# Altium PCB 底板20160428.PcbDoc (part 2 of 5)
Units mm, origin at the board's own origin, x right, y up, seen from the top; angles counter-clockwise.
Board outline 123.72 x 102.71 mm, 2 copper layers (Top Layer, Bottom Layer); 224 components, 227 nets, 768 pads, 282 vias.
Unrouted connection lines stored in the file: 2.
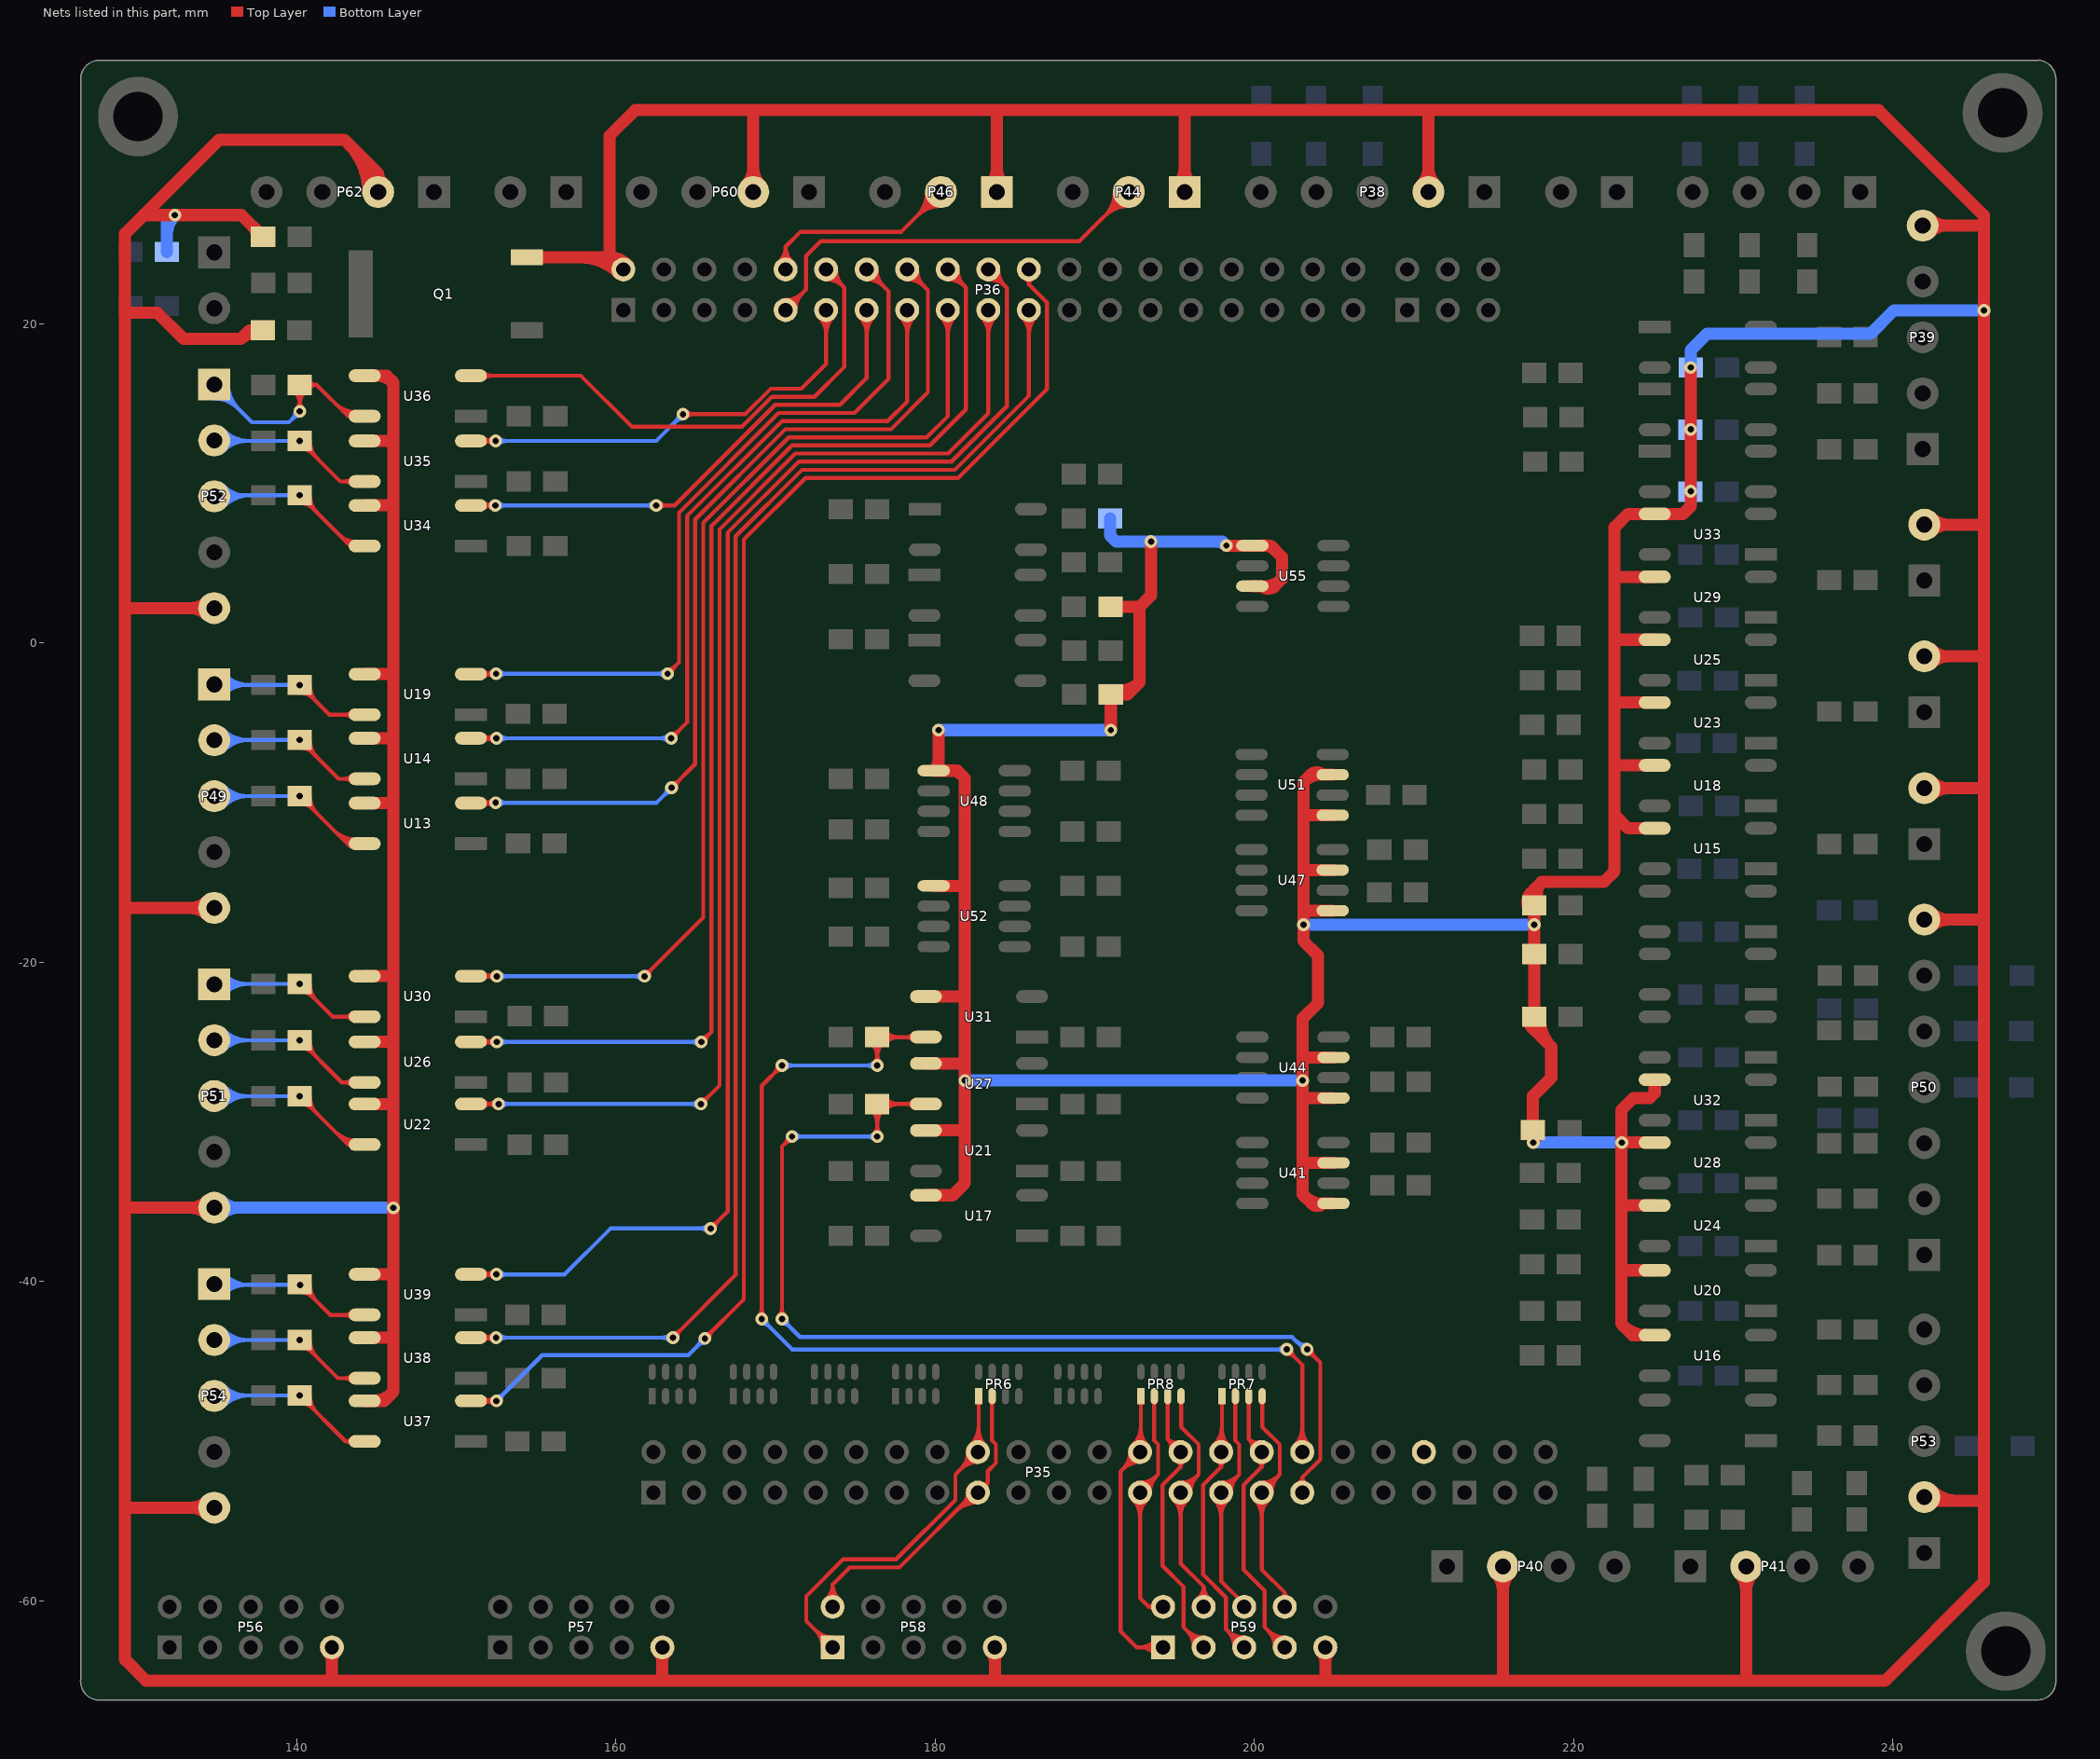
[diagram p2: the nets of this part, all layers, seen from the top]

## Via types
v1: diameter 0.8, hole 0.4, Top Layer to Bottom Layer, 282 vias

## Nets (pads, with @x,y where several pads share a name; then routed paths per layer and width w, separated by ;. In a path a pad name is that pad's centre, name@x,y a point inside that pad or via, vN(x,y) a via of type N, cw(c..) or ccw(c..) an arc to the next point about the centre after c; other vN are vias at no path point) (continued)
CDH3_KR7: P35.17 P58.2 PR6.2 | length 27.4
  Top Layer w0.254: P58.2@173.17,-59.9 ccw(c172.351,-58.979) 173.584,-58.979 ; P58.2@173.339,-60.09 ccw(c172.854,-59.544) 173.584,-59.544 ccw(c174.313,-59.544) P58.2@173.829,-60.09 ; P58.2@173.584,-60.366 173.584,-58.979 ; P58.2@173.997,-59.9 cw(c174.816,-58.979) 173.584,-58.979 ; 181.234,-54.434 cw(c182.677,-55.876) P35.17@182.677,-53.836 ; 181.668,-54 cw(c182.677,-55.009) P35.17@182.677,-53.582 ; 181.77,-53.897 ccw(c181.086,-53.213) P35.17@182.054,-53.213 ; P35.17@182.945,-52.651 ccw(c183.08,-52.37) 183.3,-52.59 ; P35.17@183.239,-52.944 cw(c183.52,-52.81) 183.3,-52.59 ; PR6.2@183.498,-47.528 cw(c183.325,-47.701) 183.57,-47.701 cw(c183.816,-47.701) PR6.2@183.642,-47.528 ; PR6.2@183.57,-47.177 183.57,-49.967 183.808,-50.205 183.808,-51.364 183.3,-51.872 183.3,-52.59 ; 173.584,-58.979 174.656,-57.906 177.762,-57.906 182.455,-53.213 P35.17@182.677,-53.213 183.3,-52.59
CDH3_KR8: P35.18 P58.1 PR6.1 | length 34.5
  Top Layer w0.254: P58.1@172.961,-62.906 ccw(c171.457,-62.906) 172.52,-61.842 ccw(c173.584,-60.779) P58.1@173.584,-62.283 ; P58.1@173.215,-62.906 ccw(c172.324,-62.906) 172.954,-62.276 ccw(c173.584,-61.646) P58.1@173.584,-62.537 ; P58.1@173.584,-62.906 171.933,-61.255 171.933,-59.707 174.242,-57.398 177.551,-57.398 181.268,-53.681 181.268,-52.082 P35.18@182.677,-50.673 182.732,-50.618 PR6.1@182.732,-47.177 ; P35.18@182.054,-50.673 cw(c180.55,-50.673) 181.613,-51.737 cw(c182.677,-52.8) P35.18@182.677,-51.296 ; P35.18@182.236,-50.232 ccw(c181.039,-49.036) 182.732,-49.036 ; P35.18@182.308,-50.673 cw(c181.417,-50.673) 182.047,-51.303 cw(c182.677,-51.933) P35.18@182.677,-51.042 ; P35.18@182.416,-50.412 ccw(c181.653,-49.649) 182.732,-49.649 ; PR6.1@182.66,-47.528 cw(c182.487,-47.701) 182.732,-47.701 cw(c182.977,-47.701) PR6.1@182.804,-47.528 ; 182.732,-49.916 ccw(c183.434,-49.916) P35.18@182.938,-50.412 ; 182.732,-49.302 ccw(c184.047,-49.302) P35.18@183.117,-50.232
CDH4_KR1: P35.31 P59.8 PR7.4 | length 23.4
  Top Layer w0.254: P35.31@200.016,-53.654 cw(c198.953,-54.717) 200.457,-54.717 cw(c201.961,-54.717) P35.31@200.897,-53.654 ; P35.31@200.196,-53.474 cw(c199.566,-54.104) 200.457,-54.104 cw(c201.348,-54.104) P35.31@200.718,-53.474 ; PR7.4@200.415,-47.528 cw(c200.241,-47.701) 200.487,-47.701 cw(c200.732,-47.701) PR7.4@200.559,-47.528 ; P35.31@200.457,-52.844 ccw(c200.457,-51.953) 201.087,-52.583 ccw(c201.717,-53.213) P35.31@200.826,-53.213 ; P35.31@200.457,-52.59 ccw(c200.457,-51.086) 201.52,-52.149 ccw(c202.584,-53.213) P35.31@201.08,-53.213 ; PR7.4@200.487,-47.177 200.487,-49.103 201.588,-50.205 201.588,-52.082 P35.31@200.457,-53.213 200.457,-58.039 201.905,-59.487 ; P59.8@201.698,-59.778 ccw(c201.596,-59.487) 201.905,-59.487 ; P59.8@201.905,-60.366 201.905,-59.487 ; P59.8@202.111,-59.778 cw(c202.213,-59.487) 201.905,-59.487
CDH4_KR2: P35.32 P59.7 PR7.3 | length 24.2
  Top Layer w0.254: PR7.3@199.577,-47.528 cw(c199.403,-47.701) 199.648,-47.701 cw(c199.894,-47.701) PR7.3@199.72,-47.528 ; PR7.3@199.648,-47.177 199.648,-49.865 ; P35.32@199.848,-50.542 ccw(c199.127,-50.386) 199.648,-49.865 ; P35.32@200.214,-51.247 cw(c200.058,-51.613) 200.457,-51.613 ; P35.32@200.325,-50.064 cw(c200.17,-49.343) 199.648,-49.865 ; P35.32@200.7,-51.247 ccw(c200.855,-51.613) 200.457,-51.613 ; P59.7@201.282,-62.906 ccw(c199.778,-62.906) 200.841,-61.842 ccw(c201.905,-60.779) P59.7@201.905,-62.283 ; P59.7@201.536,-62.906 ccw(c200.645,-62.906) 201.275,-62.276 ccw(c201.905,-61.646) P59.7@201.905,-62.537 ; P59.7@201.905,-62.906 200.635,-61.636 200.635,-59.36 199.326,-58.051 199.326,-52.745 200.457,-51.614 ; 199.648,-49.865 P35.32@200.457,-50.673 200.457,-51.614
CDH4_KR3: P35.29 P59.6 PR7.2 | length 22.3
  Top Layer w0.254: P35.29@197.476,-53.654 cw(c196.413,-54.717) 197.917,-54.717 cw(c199.421,-54.717) P35.29@198.357,-53.654 ; P35.29@197.656,-53.474 cw(c197.026,-54.104) 197.917,-54.104 cw(c198.808,-54.104) P35.29@198.178,-53.474 ; P35.29@197.917,-52.844 ccw(c197.917,-51.953) 198.547,-52.583 ccw(c199.177,-53.213) P35.29@198.286,-53.213 ; P35.29@197.917,-52.59 ccw(c197.917,-51.086) 198.98,-52.149 ccw(c200.044,-53.213) P35.29@198.54,-53.213 ; PR7.2@198.738,-47.528 cw(c198.565,-47.701) 198.81,-47.701 cw(c199.056,-47.701) PR7.2@198.882,-47.528 ; PR7.2@198.81,-47.177 198.81,-49.967 199.048,-50.205 199.048,-52.082 P35.29@197.917,-53.213 197.917,-58.761 199.365,-60.209 P59.6@199.365,-60.366
CDH4_KR4: P35.30 P59.5 PR7.1 | length 26.1
  Top Layer w0.254: P35.30@197.476,-50.232 ccw(c196.279,-49.036) 197.972,-49.036 ; P35.30@197.656,-50.412 ccw(c196.893,-49.649) 197.972,-49.649 ; P35.30@197.674,-51.247 cw(c197.518,-51.613) 197.917,-51.613 ; PR7.1@197.9,-47.528 cw(c197.727,-47.701) 197.972,-47.701 cw(c198.217,-47.701) PR7.1@198.044,-47.528 ; 197.972,-49.916 ccw(c198.674,-49.916) P35.30@198.178,-50.412 ; 197.972,-49.302 ccw(c199.287,-49.302) P35.30@198.357,-50.232 ; PR7.1@197.972,-47.177 197.972,-50.618 P35.30@197.917,-50.673 197.917,-51.614 ; P35.30@198.16,-51.247 ccw(c198.315,-51.613) 197.917,-51.613 ; P59.5@198.742,-62.906 ccw(c197.238,-62.906) 198.301,-61.842 ccw(c199.365,-60.779) P59.5@199.365,-62.283 ; P59.5@198.996,-62.906 ccw(c198.105,-62.906) 198.735,-62.276 ccw(c199.365,-61.646) P59.5@199.365,-62.537 ; P59.5@199.365,-62.906 198.222,-61.763 198.222,-59.784 196.786,-58.349 196.786,-52.745 197.917,-51.614
CDH4_KR5: P35.27 P59.4 PR8.4 | length 24.4
  Top Layer w0.254: P35.27@194.936,-53.654 cw(c193.873,-54.717) 195.377,-54.717 cw(c196.881,-54.717) P35.27@195.817,-53.654 ; P35.27@195.116,-53.474 cw(c194.486,-54.104) 195.377,-54.104 cw(c196.268,-54.104) P35.27@195.638,-53.474 ; PR8.4@195.335,-47.528 cw(c195.161,-47.701) 195.407,-47.701 cw(c195.652,-47.701) PR8.4@195.479,-47.528 ; P35.27@195.377,-52.844 ccw(c195.377,-51.953) 196.007,-52.583 ccw(c196.637,-53.213) P35.27@195.746,-53.213 ; P35.27@195.377,-52.59 ccw(c195.377,-51.086) 196.44,-52.149 ccw(c197.504,-53.213) P35.27@196,-53.213 ; PR8.4@195.407,-47.177 195.407,-49.103 196.508,-50.205 196.508,-52.082 P35.27@195.377,-53.213 195.377,-57.658 196.825,-59.106 ; P59.4@196.446,-59.871 ccw(c195.862,-59.106) 196.825,-59.106 ; P59.4@196.825,-60.366 196.825,-59.106 ; P59.4@197.203,-59.871 cw(c197.787,-59.106) 196.825,-59.106
CDH4_KR6: P35.28 P59.3 PR8.3 | length 24.2
  Top Layer w0.254: PR8.3@194.497,-47.528 cw(c194.323,-47.701) 194.568,-47.701 cw(c194.814,-47.701) PR8.3@194.64,-47.528 ; PR8.3@194.568,-47.177 194.568,-49.865 ; P35.28@194.768,-50.542 ccw(c194.047,-50.386) 194.568,-49.865 ; P35.28@195.134,-51.247 cw(c194.978,-51.613) 195.377,-51.613 ; P35.28@195.245,-50.064 cw(c195.09,-49.343) 194.568,-49.865 ; P35.28@195.62,-51.247 ccw(c195.775,-51.613) 195.377,-51.613 ; P59.3@196.202,-62.906 ccw(c194.698,-62.906) 195.761,-61.842 ccw(c196.825,-60.779) P59.3@196.825,-62.283 ; P59.3@196.456,-62.906 ccw(c195.565,-62.906) 196.195,-62.276 ccw(c196.825,-61.646) P59.3@196.825,-62.537 ; P59.3@196.825,-62.906 195.555,-61.636 195.555,-59.106 194.246,-57.797 194.246,-52.745 195.377,-51.614 ; 194.568,-49.865 P35.28@195.377,-50.673 195.377,-51.614
CDH4_KR7: P35.25 P59.2 PR8.2 | length 23.6
  Top Layer w0.254: P35.25@192.396,-53.654 cw(c191.333,-54.717) 192.837,-54.717 cw(c194.341,-54.717) P35.25@193.277,-53.654 ; P35.25@192.576,-53.474 cw(c191.946,-54.104) 192.837,-54.104 cw(c193.728,-54.104) P35.25@193.098,-53.474 ; P35.25@192.837,-52.844 ccw(c192.837,-51.953) 193.467,-52.583 ccw(c194.097,-53.213) P35.25@193.206,-53.213 ; P35.25@192.837,-52.59 ccw(c192.837,-51.086) 193.9,-52.149 ccw(c194.964,-53.213) P35.25@193.46,-53.213 ; PR8.2@193.658,-47.528 cw(c193.485,-47.701) 193.73,-47.701 cw(c193.976,-47.701) PR8.2@193.802,-47.528 ; P59.2@193.701,-60.585 ccw(c193.386,-60.703) 193.386,-60.366 ; P59.2@193.701,-60.147 cw(c193.386,-60.029) 193.386,-60.366 ; PR8.2@193.73,-47.177 193.73,-49.967 193.968,-50.205 193.968,-52.082 P35.25@192.837,-53.213 192.837,-59.817 193.386,-60.366 ; P59.2@194.285,-60.366 193.386,-60.366
CDH4_KR8: P35.26 P59.1 PR8.1 | length 30
  Top Layer w0.254: P35.26@192.214,-50.673 cw(c190.71,-50.673) 191.773,-51.737 cw(c192.837,-52.8) P35.26@192.837,-51.296 ; P35.26@192.396,-50.232 ccw(c191.199,-49.036) 192.892,-49.036 ; P35.26@192.468,-50.673 cw(c191.577,-50.673) 192.207,-51.303 cw(c192.837,-51.933) P35.26@192.837,-51.042 ; P35.26@192.576,-50.412 ccw(c191.813,-49.649) 192.892,-49.649 ; PR8.1@192.82,-47.528 cw(c192.647,-47.701) 192.892,-47.701 cw(c193.137,-47.701) PR8.1@192.964,-47.528 ; 192.892,-49.916 ccw(c193.594,-49.916) P35.26@193.098,-50.412 ; 192.892,-49.302 ccw(c194.207,-49.302) P35.26@193.277,-50.232 ; PR8.1@192.892,-47.177 192.892,-50.618 P35.26@192.837,-50.673 191.618,-51.892 191.618,-61.9 192.624,-62.906 P59.1@194.285,-62.906 ; P59.1@193.844,-63.346 ccw(c192.781,-64.41) 192.781,-62.906 ccw(c192.781,-61.402) P59.1@193.844,-62.465 ; P59.1@194.024,-63.167 ccw(c193.394,-63.797) 193.394,-62.906 ccw(c193.394,-62.015) P59.1@194.024,-62.645
DJ1_KC1: P36.16 U13.3 | length 66.7
  Top Layer w0.254: U13.3@150.927,-10.008 v1(152.476,-10.008) v1@152.48,-10.008 ; U13.3@151.715,-10.225 cw(c152.24,-10.75) v1@152.24,-10.008 ; U13.3@151.715,-9.839 ccw(c152.122,-9.432) v1@152.122,-10.008 ; 151.988,-9.972 ccw(c152.046,-9.752) v1@152.241,-9.868 ; 152.03,-9.983 cw(c151.94,-10.317) v1@152.24,-10.144 ; v1@152.239,-9.873 cw(c151.858,-9.656) 151.971,-10.08 cw(c152.043,-10.348) v1@152.262,-10.176 ; v1@152.283,-10.201 ccw(c151.817,-10.667) 151.817,-10.008 ccw(c151.817,-9.349) v1@152.283,-9.815 ; v1(163.5,-9.068) 164.973,-7.595 164.973,7.74 170.619,13.386 177.241,13.386 179.553,15.697 179.553,22.098 P36.16@178.257,23.393 ; v1@163.5,-8.795 ccw(c163.5,-8.136) 163.966,-8.602 ccw(c164.432,-9.068) v1@163.773,-9.068 ; P36.16@178.257,22.77 cw(c178.257,21.266) 179.321,22.33 cw(c180.384,23.393) P36.16@178.88,23.393 ; P36.16@178.257,23.024 cw(c178.257,22.134) 178.887,22.763 cw(c179.517,23.393) P36.16@178.626,23.393
  Bottom Layer w0.254: v1(152.476,-10.008) 162.56,-10.008 v1(163.5,-9.068) ; v1@152.669,-10.201 cw(c153.135,-10.667) 153.135,-10.008 cw(c153.135,-9.349) v1@152.669,-9.815 ; v1@163.227,-9.068 cw(c162.568,-9.068) 163.034,-9.534 cw(c163.5,-10) v1@163.5,-9.341
DJ1_KC2: P36.15 U14.3 | length 59.5
  Top Layer w0.254: U14.3@150.927,-5.969 v1@152.48,-5.969 ; U14.3@151.715,-6.161 cw(c152.179,-6.625) v1@152.179,-5.969 ; U14.3@151.715,-5.775 ccw(c152.184,-5.306) v1@152.184,-5.969 ; 152.002,-6.016 cw(c152.074,-6.287) v1@152.304,-6.126 ; 152.001,-5.92 ccw(c152.074,-5.647) v1@152.304,-5.811 ; 152.075,-5.94 cw(c151.983,-6.283) v1@152.291,-6.105 ; 152.077,-5.996 ccw(c151.986,-5.657) v1@152.291,-5.833 ; v1@152.334,-6.162 ccw(c151.868,-6.628) 151.868,-5.969 ccw(c151.868,-5.31) v1@152.334,-5.776 ; v1(163.474,-5.969) 164.465,-4.978 164.465,7.95 170.409,13.894 177.031,13.894 178.257,15.12 P36.15@178.257,20.853 ; v1@163.474,-5.696 ccw(c163.474,-5.037) 163.94,-5.503 ccw(c164.406,-5.969) v1@163.747,-5.969 ; P36.15@177.817,20.413 cw(c176.753,19.349) 178.257,19.349 cw(c179.761,19.349) P36.15@178.698,20.413 ; P36.15@177.996,20.592 cw(c177.366,19.963) 178.257,19.963 cw(c179.148,19.963) P36.15@178.518,20.592
  Bottom Layer w0.254: v1(152.527,-5.969) v1(163.474,-5.969) ; v1@152.72,-6.162 cw(c153.186,-6.628) 153.186,-5.969 cw(c153.186,-5.31) v1@152.72,-5.776 ; v1@163.281,-6.162 ccw(c162.815,-6.628) 162.815,-5.969 ccw(c162.815,-5.31) v1@163.281,-5.776
DJ1_KC3: P36.14 U19.3 | length 56.9
  Top Layer w0.254: U19.3@150.952,-1.93 v1(152.505,-1.93) ; U19.3@151.715,-2.148 cw(c152.24,-2.673) v1@152.24,-1.93 ; U19.3@151.715,-1.762 ccw(c152.122,-1.355) v1@152.122,-1.93 ; 151.984,-1.999 cw(c152.06,-2.285) v1@152.292,-2.101 ; 152,-1.898 ccw(c152.063,-1.662) v1@152.272,-1.789 ; 152.011,-1.992 ccw(c151.901,-1.582) v1@152.269,-1.794 ; 152.074,-1.918 cw(c151.991,-2.227) v1@152.269,-2.067 ; v1@152.312,-2.123 ccw(c151.846,-2.589) 151.846,-1.93 ccw(c151.846,-1.271) v1@152.312,-1.737 ; v1(163.246,-1.93) 163.957,-1.219 163.957,8.16 170.198,14.402 174.955,14.402 177.089,16.535 177.089,22.022 P36.14@175.717,23.393 ; v1@163.246,-1.657 ccw(c163.246,-0.998) 163.712,-1.464 ccw(c164.178,-1.93) v1@163.519,-1.93 ; P36.14@175.717,22.77 cw(c175.717,21.266) 176.781,22.33 cw(c177.844,23.393) P36.14@176.34,23.393 ; P36.14@175.717,23.024 cw(c175.717,22.134) 176.347,22.763 cw(c176.977,23.393) P36.14@176.086,23.393
  Bottom Layer w0.254: v1(152.505,-1.93) v1(163.246,-1.93) ; v1@152.698,-2.123 cw(c153.164,-2.589) 153.164,-1.93 cw(c153.164,-1.271) v1@152.698,-1.737 ; v1@163.053,-2.123 ccw(c162.587,-2.589) 162.587,-1.93 ccw(c162.587,-1.271) v1@163.053,-1.737
DJ1_KC11: P49.3 R43.1 U13.6 | length 25.1
  Top Layer w0.254: R43.1@140.2,-9.867 cw(c140.2,-10.527) 140.666,-10.06 cw(c141.132,-9.594) R43.1@140.473,-9.594 ; v1(140.2,-9.594) 143.178,-12.572 ; R43.1@140.278,-9.373 cw(c140.1,-9.882) R43.1@140.621,-9.742 ; R43.1@140.327,-10.102 cw(c140.327,-11.022) 140.978,-10.372 ; R43.1@140.581,-9.594 ccw(c141.501,-9.594) 140.851,-10.245 ; R43.1@140.835,-9.594 ccw(c142.368,-9.594) 141.284,-10.678 ; 142.362,-11.756 ccw(c143.672,-10.447) U13.6@143.672,-12.299 ; 142.796,-12.19 ccw(c143.672,-11.314) U13.6@143.672,-12.553 ; 143.229,-12.624 ccw(c143.672,-12.181) U13.6@143.672,-12.807 ; U13.6@143.441,-12.717 ccw(c143.178,-12.883) 143.178,-12.572 ; U13.6@143.441,-12.427 cw(c143.178,-12.261) 143.178,-12.572 ; U13.6@144.272,-12.572 143.178,-12.572
  Bottom Layer w0.254: P49.3@134.853,-9.594 v1(140.2,-9.594) ; P49.3@135.286,-10.036 cw(c136.353,-11.103) 136.353,-9.594 ; P49.3@135.286,-9.161 ccw(c136.333,-8.114) 136.333,-9.594 ; P49.3@135.466,-10.216 cw(c136.966,-11.716) 136.966,-9.594 ; P49.3@135.466,-8.981 ccw(c136.946,-7.501) 136.946,-9.594 ; v1@140.007,-9.787 ccw(c139.541,-10.254) 139.541,-9.594 ccw(c139.541,-8.935) v1@140.007,-9.401
DJ1_KC22: P49.2 R45.1 U14.6 | length 22.3
  Top Layer w0.254: R45.1@140.2,-6.344 cw(c140.2,-7.003) 140.666,-6.537 cw(c141.132,-6.071) R45.1@140.473,-6.071 ; v1(140.2,-6.071) 142.638,-8.508 U14.6@144.272,-8.508 ; R45.1@140.278,-5.849 cw(c140.1,-6.358) R45.1@140.621,-6.218 ; R45.1@140.327,-6.579 cw(c140.327,-7.498) 140.978,-6.848 ; R45.1@140.581,-6.071 ccw(c141.501,-6.071) 140.851,-6.721 ; R45.1@140.835,-6.071 ccw(c142.368,-6.071) 141.284,-7.155 ; U14.6@143.479,-8.701 ccw(c143.013,-9.167) 143.013,-8.508 ccw(c143.013,-7.849) U14.6@143.479,-8.315
  Bottom Layer w0.254: P49.2@134.877,-6.071 v1(140.2,-6.071) ; P49.2@135.286,-6.536 cw(c136.411,-7.661) 136.411,-6.071 ; P49.2@135.286,-5.661 ccw(c136.275,-4.672) 136.275,-6.071 ; P49.2@135.466,-6.716 cw(c137.024,-8.274) 137.024,-6.071 ; P49.2@135.466,-5.481 ccw(c136.889,-4.059) 136.889,-6.071 ; v1@140.007,-6.264 ccw(c139.541,-6.73) 139.541,-6.071 ccw(c139.541,-5.412) v1@140.007,-5.878
DJ1_KC33: P49.1 R54.1 U19.6 | length 22.1
  Top Layer w0.254: R54.1@140.2,-2.908 cw(c140.2,-3.567) 140.666,-3.101 cw(c141.132,-2.635) R54.1@140.473,-2.635 ; v1(140.2,-2.635) 142.06,-4.495 U19.6@144.272,-4.495 ; R54.1@140.278,-2.413 cw(c140.1,-2.922) R54.1@140.621,-2.783 ; R54.1@140.327,-3.143 cw(c140.327,-4.063) 140.978,-3.412 ; R54.1@140.581,-2.635 ccw(c141.501,-2.635) 140.851,-3.285 ; R54.1@140.835,-2.635 ccw(c142.368,-2.635) 141.284,-3.719 ; U19.6@143.479,-4.688 ccw(c143.013,-5.154) 143.013,-4.495 ccw(c143.013,-3.836) U19.6@143.479,-4.302
  Bottom Layer w0.254: P49.1@134.885,-2.635 v1(140.2,-2.635) ; P49.1@135.286,-3.036 cw(c136.256,-4.006) 136.256,-2.635 ; P49.1@135.286,-2.161 ccw(c136.43,-1.017) 136.43,-2.635 ; P49.1@135.466,-3.216 cw(c136.869,-4.619) 136.869,-2.635 ; P49.1@135.466,-1.981 ccw(c137.044,-0.404) 137.044,-2.635 ; v1@140.007,-2.828 ccw(c139.541,-3.294) 139.541,-2.635 ccw(c139.541,-1.976) v1@140.007,-2.442
DJ2_KC1: P36.19 U22.3 | length 86.1
  Top Layer w0.254: U22.3@150.923,-28.88 v1(152.654,-28.88) ; U22.3@151.715,-29.072 cw(c152.179,-29.535) 152.179,-28.88 ; U22.3@151.715,-28.686 ccw(c152.184,-28.217) 152.184,-28.88 ; v1@152.461,-29.073 ccw(c151.995,-29.539) 151.995,-28.88 ccw(c151.995,-28.221) v1@152.461,-28.687 ; v1(165.329,-28.88) 166.497,-27.711 166.497,7.108 171.251,11.862 180.815,11.862 183.337,14.384 P36.19@183.337,20.853 ; v1@165.329,-28.607 ccw(c165.329,-27.948) 165.795,-28.414 ccw(c166.261,-28.88) v1@165.602,-28.88 ; P36.19@182.897,20.413 cw(c181.833,19.349) 183.337,19.349 cw(c184.841,19.349) P36.19@183.778,20.413 ; P36.19@183.076,20.592 cw(c182.446,19.963) 183.337,19.963 cw(c184.228,19.963) P36.19@183.598,20.592
  Bottom Layer w0.254: v1(152.654,-28.88) v1@165.303,-28.88 ; v1@152.847,-29.073 cw(c153.313,-29.539) 153.313,-28.88 cw(c153.313,-28.221) v1@152.847,-28.687 ; v1@165.136,-29.073 ccw(c164.67,-29.539) 164.67,-28.88 ccw(c164.67,-28.221) v1@165.136,-28.687
DJ2_KC2: P36.18 U26.3 | length 85.4
  Top Layer w0.254: U26.3@150.93,-24.994 v1(152.552,-24.994) ; U26.3@151.715,-25.179 cw(c152.162,-25.626) v1@152.162,-24.994 ; U26.3@151.715,-24.793 ccw(c152.2,-24.307) v1@152.2,-24.994 ; 152.01,-24.943 ccw(c152.089,-24.647) v1@152.334,-24.83 ; 152.015,-25.033 cw(c152.09,-25.312) v1@152.327,-25.148 ; 152.105,-24.968 cw(c152.015,-25.304) v1@152.316,-25.13 ; 152.125,-25.003 ccw(c152.044,-24.7) v1@152.316,-24.857 ; v1@152.359,-25.187 ccw(c151.893,-25.653) 151.893,-24.994 ccw(c151.893,-24.335) v1@152.359,-24.801 ; v1(165.354,-24.994) 165.989,-24.359 165.989,7.319 171.04,12.37 179.68,12.37 181.933,14.623 181.933,22.258 P36.18@180.797,23.393 ; v1@165.354,-24.721 ccw(c165.354,-24.062) 165.82,-24.528 ccw(c166.286,-24.994) v1@165.627,-24.994 ; P36.18@180.797,22.77 cw(c180.797,21.266) 181.861,22.33 cw(c182.924,23.393) P36.18@181.42,23.393 ; P36.18@180.797,23.024 cw(c180.797,22.134) 181.427,22.763 cw(c182.057,23.393) P36.18@181.166,23.393
  Bottom Layer w0.254: v1(152.552,-24.994) v1(165.354,-24.994) ; v1@152.745,-25.187 cw(c153.211,-25.653) 153.211,-24.994 cw(c153.211,-24.335) v1@152.745,-24.801 ; v1@165.161,-25.187 ccw(c164.695,-25.653) 164.695,-24.994 ccw(c164.695,-24.335) v1@165.161,-24.801
DJ2_KC3: P36.17 U30.3 | length 75.1
  Top Layer w0.254: U30.3@150.935,-20.879 v1(152.552,-20.879) ; U30.3@151.715,-21.059 cw(c152.151,-21.495) 152.151,-20.879 ; U30.3@151.715,-20.673 ccw(c152.211,-20.177) v1@152.211,-20.879 ; 152.008,-20.824 ccw(c152.089,-20.524) v1@152.336,-20.713 ; 152.099,-20.849 cw(c152.006,-21.194) v1@152.316,-21.015 ; v1@152.359,-21.072 ccw(c151.893,-21.538) 151.893,-20.879 ccw(c151.893,-20.22) v1@152.359,-20.686 ; v1(161.798,-20.879) 165.481,-17.196 165.481,7.529 170.83,12.878 179.469,12.878 180.797,14.206 P36.17@180.797,20.853 ; v1@161.798,-20.606 ccw(c161.798,-19.947) 162.264,-20.413 ccw(c162.73,-20.879) v1@162.071,-20.879 ; P36.17@180.357,20.413 cw(c179.293,19.349) 180.797,19.349 cw(c182.301,19.349) P36.17@181.238,20.413 ; P36.17@180.536,20.592 cw(c179.906,19.963) 180.797,19.963 cw(c181.688,19.963) P36.17@181.058,20.592
  Bottom Layer w0.254: v1(152.552,-20.879) v1(161.798,-20.879) ; v1@152.745,-21.072 cw(c153.211,-21.538) 153.211,-20.879 cw(c153.211,-20.22) v1@152.745,-20.686 ; v1@161.605,-21.072 ccw(c161.139,-21.538) 161.139,-20.879 ccw(c161.139,-20.22) v1@161.605,-20.686
DJ2_KC11: P51.3 R61.1 U22.6 | length 24.3
  Top Layer w0.254: R61.1@140.2,-28.663 cw(c140.2,-29.323) 140.666,-28.856 cw(c141.132,-28.39) R61.1@140.473,-28.39 ; v1(140.2,-28.39) 143.228,-31.419 ; R61.1@140.278,-28.169 cw(c140.1,-28.678) R61.1@140.621,-28.538 ; R61.1@140.327,-28.898 cw(c140.327,-29.818) 140.978,-29.168 ; R61.1@140.581,-28.39 ccw(c141.501,-28.39) 140.851,-29.041 ; R61.1@140.835,-28.39 ccw(c142.368,-28.39) 141.284,-29.474 ; 142.449,-30.639 ccw(c143.672,-29.416) U22.6@143.672,-31.146 ; 142.882,-31.073 ccw(c143.672,-30.283) U22.6@143.672,-31.4 ; U22.6@143.428,-31.542 ccw(c143.229,-31.643) 143.229,-31.419 ; U22.6@143.428,-31.296 cw(c143.229,-31.195) 143.229,-31.419 ; U22.6@144.272,-31.419 143.228,-31.419
  Bottom Layer w0.254: P51.3@134.861,-28.39 v1(140.2,-28.39) ; P51.3@135.286,-28.816 cw(c136.313,-29.842) 136.313,-28.39 ; P51.3@135.286,-27.94 ccw(c136.373,-26.854) 136.373,-28.39 ; P51.3@135.466,-28.995 cw(c136.926,-30.456) 136.926,-28.39 ; P51.3@135.466,-27.761 ccw(c136.986,-26.24) 136.986,-28.39 ; v1@140.007,-28.583 ccw(c139.541,-29.05) 139.541,-28.39 ccw(c139.541,-27.731) v1@140.007,-28.197
DJ2_KC22: P51.2 R69.1 U26.6 | length 22.4
  Top Layer w0.254: R69.1@140.2,-25.158 cw(c140.2,-25.817) 140.666,-25.351 cw(c141.132,-24.885) R69.1@140.473,-24.885 ; v1(140.2,-24.885) 142.841,-27.526 U26.6@144.272,-27.526 ; R69.1@140.278,-24.663 cw(c140.1,-25.173) R69.1@140.621,-25.033 ; R69.1@140.327,-25.393 cw(c140.327,-26.313) 140.978,-25.663 ; R69.1@140.581,-24.885 ccw(c141.501,-24.885) 140.851,-25.536 ; R69.1@140.835,-24.885 ccw(c142.368,-24.885) 141.284,-25.969 ; U26.6@143.479,-27.719 ccw(c143.013,-28.185) 143.013,-27.526 ccw(c143.013,-26.867) U26.6@143.479,-27.333
  Bottom Layer w0.254: P51.2@134.856,-24.885 v1(140.2,-24.885) ; P51.2@135.286,-25.316 cw(c136.326,-26.355) 136.326,-24.885 ; P51.2@135.286,-24.44 ccw(c136.36,-23.366) 136.36,-24.885 ; P51.2@135.466,-25.495 cw(c136.939,-26.968) 136.939,-24.885 ; P51.2@135.466,-24.261 ccw(c136.974,-22.753) 136.974,-24.885 ; v1@140.007,-25.078 ccw(c139.541,-25.544) 139.541,-24.885 ccw(c139.541,-24.226) v1@140.007,-24.692
DJ2_KC33: P51.1 R77.1 U30.6 | length 22.2
  Top Layer w0.254: R77.1@140.2,-21.628 cw(c140.2,-22.287) 140.666,-21.821 cw(c141.132,-21.355) R77.1@140.473,-21.355 ; v1(140.2,-21.355) 142.252,-23.406 U30.6@144.272,-23.406 ; R77.1@140.278,-21.133 cw(c140.1,-21.642) R77.1@140.621,-21.502 ; R77.1@140.327,-21.863 cw(c140.327,-22.782) 140.978,-22.132 ; R77.1@140.581,-21.355 ccw(c141.501,-21.355) 140.851,-22.005 ; R77.1@140.835,-21.355 ccw(c142.368,-21.355) 141.284,-22.439 ; U30.6@143.479,-23.599 ccw(c143.013,-24.065) 143.013,-23.406 ccw(c143.013,-22.747) U30.6@143.479,-23.213
  Bottom Layer w0.254: P51.1@134.872,-21.355 v1(140.2,-21.355) ; P51.1@135.286,-21.816 cw(c136.399,-22.929) 136.399,-21.355 ; P51.1@135.286,-20.94 ccw(c136.287,-19.94) 136.287,-21.355 ; P51.1@135.466,-21.995 cw(c137.013,-23.542) 137.013,-21.355 ; P51.1@135.466,-20.761 ccw(c136.9,-19.327) 136.9,-21.355 ; v1@140.007,-21.548 ccw(c139.541,-22.014) 139.541,-21.355 ccw(c139.541,-20.696) v1@140.007,-21.162
DJ3_KC1: P36.13 U34.3 | length 42.5
  Top Layer w0.254: U34.3@150.922,8.612 v1(152.452,8.612) ; U34.3@151.715,8.419 cw(c152.181,7.953) 152.181,8.612 cw(c152.181,9.271) U34.3@151.715,8.805 ; v1@152.214,8.478 ccw(c151.866,8.283) 151.969,8.669 ccw(c152.03,8.897) v1@152.226,8.764 ; v1@152.214,8.745 cw(c151.866,8.94) 151.969,8.555 cw(c152.03,8.327) v1@152.226,8.459 ; v1@152.259,8.419 ccw(c151.793,7.953) 151.793,8.612 ccw(c151.793,9.271) v1@152.259,8.805 ; v1(162.535,8.611) 163.689,8.611 169.988,14.91 174.041,14.91 175.717,16.586 P36.13@175.717,20.853 ; v1@162.728,8.418 cw(c163.194,7.952) 163.194,8.611 cw(c163.194,9.27) v1@162.728,8.804 ; P36.13@175.277,20.413 cw(c174.213,19.349) 175.717,19.349 cw(c177.221,19.349) P36.13@176.158,20.413 ; P36.13@175.456,20.592 cw(c174.826,19.963) 175.717,19.963 cw(c176.608,19.963) P36.13@175.978,20.592
  Bottom Layer w0.254: v1@152.453,8.611 v1(162.535,8.611) ; v1@152.645,8.419 cw(c153.108,7.955) 153.108,8.611 ; v1@152.645,8.805 ccw(c153.113,9.273) 153.113,8.611 ; v1@162.342,8.418 ccw(c161.876,7.952) 161.876,8.611 ccw(c161.876,9.27) v1@162.342,8.804
DJ3_KC2: P36.11 U35.3 | length 37.8
  Top Layer w0.254: U35.3@150.922,12.65 v1(152.475,12.65) ; U35.3@151.715,12.457 cw(c152.181,11.991) 152.181,12.65 cw(c152.181,13.309) U35.3@151.715,12.843 ; 151.979,12.596 cw(c152.044,12.354) v1@152.25,12.496 ; 151.979,12.704 ccw(c152.044,12.946) v1@152.25,12.805 ; 151.996,12.601 ccw(c151.893,12.986) v1@152.239,12.787 ; 151.996,12.7 cw(c151.893,12.314) v1@152.239,12.514 ; v1@152.282,12.457 ccw(c151.816,11.991) 151.816,12.65 ccw(c151.816,13.309) v1@152.282,12.843 ; v1(164.211,14.326) 168.111,14.326 169.711,15.926 171.628,15.926 173.177,17.475 P36.11@173.177,20.853 ; v1@164.404,14.133 cw(c164.87,13.667) 164.87,14.326 cw(c164.87,14.985) v1@164.404,14.519 ; P36.11@172.737,20.413 cw(c171.673,19.349) 173.177,19.349 cw(c174.681,19.349) P36.11@173.618,20.413 ; P36.11@172.916,20.592 cw(c172.286,19.963) 173.177,19.963 cw(c174.068,19.963) P36.11@173.438,20.592
  Bottom Layer w0.254: v1(152.475,12.65) 162.536,12.65 v1(164.211,14.326) ; v1@152.668,12.457 cw(c153.134,11.991) 153.134,12.65 cw(c153.134,13.309) v1@152.668,12.843 ; v1@163.938,14.326 cw(c163.279,14.326) 163.745,13.86 cw(c164.211,13.394) v1@164.211,14.053
DJ3_KC3: P36.12 U36.3 | length 37.6
  Top Layer w0.254: U36.3@150.922,16.74 157.809,16.74 161.011,13.538 167.898,13.538 169.778,15.418 172.441,15.418 174.317,17.294 174.317,22.254 P36.12@173.177,23.393 ; U36.3@151.715,16.547 cw(c152.181,16.081) 152.181,16.74 cw(c152.181,17.399) U36.3@151.715,16.933 ; P36.12@173.177,22.77 cw(c173.177,21.266) 174.241,22.33 cw(c175.304,23.393) P36.12@173.8,23.393 ; P36.12@173.177,23.024 cw(c173.177,22.134) 173.807,22.763 cw(c174.437,23.393) P36.12@173.546,23.393
DJ3_KC11: P52.3 R85.1 U34.6 | length 24.1
  Top Layer w0.254: R85.1@140.2,8.979 cw(c140.2,8.32) 140.666,8.786 cw(c141.132,9.252) R85.1@140.473,9.252 ; v1(140.2,9.252) 143.381,6.072 U34.6@144.272,6.072 ; R85.1@140.278,9.474 cw(c140.1,8.965) R85.1@140.621,9.105 ; R85.1@140.327,8.744 cw(c140.327,7.825) 140.978,8.475 ; R85.1@140.581,9.252 ccw(c141.501,9.252) 140.851,8.602 ; R85.1@140.835,9.252 ccw(c142.368,9.252) 141.284,8.168 ; 142.709,6.744 ccw(c143.672,7.706) U34.6@143.672,6.345 ; 143.143,6.31 ccw(c143.672,6.839) U34.6@143.672,6.091
  Bottom Layer w0.254: P52.3@134.92,9.252 v1(140.2,9.252) ; P52.3@135.107,8.923 cw(c135.903,8.127) 135.903,9.252 ; P52.3@135.286,8.743 cw(c136.516,7.514) 136.516,9.252 ; P52.3@135.286,9.618 ccw(c136.17,10.502) 136.17,9.252 ; P52.3@135.466,8.563 cw(c137.129,6.9) 137.129,9.252 ; P52.3@135.466,9.798 ccw(c136.783,11.116) 136.783,9.252 ; v1@140.007,9.059 ccw(c139.541,8.593) 139.541,9.252 ccw(c139.541,9.911) v1@140.007,9.445
DJ3_KC22: P52.2 R87.1 U35.6 | length 22.4
  Top Layer w0.254: R87.1@140.2,12.383 cw(c140.2,11.724) 140.666,12.19 cw(c141.132,12.656) R87.1@140.473,12.656 ; v1(140.2,12.656) 142.746,10.11 U35.6@144.272,10.11 ; R87.1@140.278,12.878 cw(c140.1,12.369) R87.1@140.621,12.508 ; R87.1@140.327,12.148 cw(c140.327,11.228) 140.978,11.879 ; R87.1@140.581,12.656 ccw(c141.501,12.656) 140.851,12.006 ; R87.1@140.835,12.656 ccw(c142.368,12.656) 141.284,11.572 ; U35.6@143.479,9.917 ccw(c143.013,9.451) 143.013,10.11 ccw(c143.013,10.769) U35.6@143.479,10.303
  Bottom Layer w0.254: P52.2@134.873,12.656 v1(140.2,12.656) ; P52.2@135.286,12.243 cw(c136.283,11.246) 136.283,12.656 ; P52.2@135.286,13.118 ccw(c136.403,14.235) 136.403,12.656 ; P52.2@135.466,12.063 cw(c136.896,10.633) 136.896,12.656 ; P52.2@135.466,13.298 ccw(c137.016,14.848) 137.016,12.656 ; v1@140.007,12.463 ccw(c139.541,11.997) 139.541,12.656 ccw(c139.541,13.315) v1@140.007,12.849
DJ3_KC33: P52.1 R89.1 U36.6 | length 26.8
  Top Layer w0.254: R89.1@139.841,15.802 cw(c138.955,14.916) 140.208,14.916 ; v1@140.015,14.696 ccw(c139.549,15.162) 140.208,15.162 ccw(c140.867,15.162) v1@140.401,14.696 ; R89.1@140.2,16.161 141.268,16.161 ; v1(140.208,14.503) R89.1@140.208,16.153 ; 140.208,14.954 cw(c141.408,14.954) R89.1@140.559,15.802 ; R89.1@140.752,15.883 cw(c141.268,15.544) 141.268,16.161 ; R89.1@140.752,16.44 ccw(c141.268,16.778) 141.268,16.161 ; 142.451,14.978 ccw(c143.672,16.2) U36.6@143.672,14.473 ; 142.884,14.545 ccw(c143.672,15.333) U36.6@143.672,14.219 ; U36.6@143.428,14.077 ccw(c143.23,13.978) 143.23,14.2 ; U36.6@143.428,14.322 cw(c143.23,14.422) 143.23,14.2 ; U36.6@144.272,14.2 143.23,14.2 ; 141.268,16.161 143.23,14.2
  Bottom Layer w0.254: P52.1@134.849,15.308 cw(c134.849,13.2) 136.339,14.69 cw(c137.829,16.181) P52.1@135.722,16.181 ; P52.1@134.849,15.562 cw(c134.849,14.067) 135.905,15.124 cw(c136.962,16.181) P52.1@135.468,16.181 ; P52.1@134.849,16.181 137.212,13.818 139.522,13.818 v1(140.208,14.503) ; v1@139.935,14.503 cw(c139.276,14.503) 139.742,14.037 cw(c140.208,13.571) v1@140.208,14.23
DJ4_KC1: P36.22 U37.3 | length 105.5
  Top Layer w0.254: U37.3@150.923,-47.473 v1(152.527,-47.473) ; U37.3@151.715,-47.665 cw(c152.179,-48.128) v1@152.179,-47.473 ; U37.3@151.715,-47.279 ccw(c152.184,-46.81) v1@152.184,-47.473 ; 152.002,-47.52 cw(c152.074,-47.791) v1@152.304,-47.63 ; 152.001,-47.424 ccw(c152.074,-47.151) v1@152.304,-47.314 ; 152.075,-47.443 cw(c151.983,-47.787) v1@152.291,-47.609 ; 152.077,-47.5 ccw(c151.986,-47.16) v1@152.291,-47.336 ; v1@152.334,-47.666 ccw(c151.868,-48.132) 151.868,-47.473 ccw(c151.868,-46.814) v1@152.334,-47.28 ; v1(165.583,-43.561) 168.021,-41.123 168.021,6.477 171.882,10.338 181.447,10.338 187.008,15.899 187.008,21.322 185.877,22.453 ; v1@165.583,-43.288 ccw(c165.583,-42.629) 166.049,-43.095 ccw(c166.515,-43.561) v1@165.856,-43.561 ; P36.22@185.634,22.82 cw(c185.479,22.453) 185.877,22.453 ; P36.22@185.877,23.393 185.877,22.453 ; P36.22@186.12,22.82 ccw(c186.276,22.453) 185.877,22.453
  Bottom Layer w0.254: v1(152.527,-47.473) 155.398,-44.601 164.542,-44.601 v1(165.583,-43.561) ; v1@152.527,-47.2 ccw(c152.527,-46.541) 152.993,-47.007 ccw(c153.459,-47.473) v1@152.8,-47.473 ; v1@165.31,-43.561 cw(c164.651,-43.561) 165.117,-44.027 cw(c165.583,-44.493) v1@165.583,-43.834
DJ4_KC2: P36.21 U38.3 | length 102
  Top Layer w0.254: U38.3@150.926,-43.51 v1(152.502,-43.51) ; U38.3@151.715,-43.707 cw(c152.19,-44.182) v1@152.19,-43.51 ; U38.3@151.715,-43.321 ccw(c152.172,-42.863) v1@152.172,-43.51 ; 151.989,-43.564 cw(c152.059,-43.825) v1@152.279,-43.668 ; 151.992,-43.462 ccw(c152.059,-43.208) v1@152.276,-43.356 ; 152.032,-43.552 ccw(c151.933,-43.182) v1@152.265,-43.374 ; 152.042,-43.475 cw(c151.946,-43.831) v1@152.265,-43.647 ; v1@152.309,-43.703 ccw(c151.843,-44.169) 151.843,-43.51 ccw(c151.843,-42.851) v1@152.309,-43.317 ; v1(163.576,-43.51) 167.513,-39.573 167.513,6.687 171.671,10.846 181.236,10.846 185.877,15.487 P36.21@185.877,20.853 ; v1@163.576,-43.237 ccw(c163.576,-42.578) 164.042,-43.044 ccw(c164.508,-43.51) v1@163.849,-43.51 ; P36.21@185.437,20.413 cw(c184.373,19.349) 185.877,19.349 cw(c187.381,19.349) P36.21@186.318,20.413 ; P36.21@185.616,20.592 cw(c184.986,19.963) 185.877,19.963 cw(c186.768,19.963) P36.21@186.138,20.592
  Bottom Layer w0.254: v1(152.502,-43.51) v1(163.576,-43.51) ; v1@152.695,-43.703 cw(c153.161,-44.169) 153.161,-43.51 cw(c153.161,-42.851) v1@152.695,-43.317 ; v1@163.383,-43.703 ccw(c162.917,-44.169) 162.917,-43.51 ccw(c162.917,-42.851) v1@163.383,-43.317
DJ4_KC3: P36.20 U39.3 | length 100.2
  Top Layer w0.254: U39.3@150.922,-39.547 150.923,-39.548 v1(152.527,-39.548) ; U39.3@151.715,-39.74 cw(c152.179,-40.203) v1@152.179,-39.548 ; U39.3@151.715,-39.354 ccw(c152.184,-38.885) v1@152.184,-39.548 ; 152.002,-39.595 cw(c152.074,-39.866) v1@152.304,-39.705 ; 152.001,-39.499 ccw(c152.074,-39.226) v1@152.304,-39.39 ; 152.075,-39.519 cw(c151.983,-39.862) v1@152.291,-39.684 ; 152.077,-39.575 ccw(c151.986,-39.236) v1@152.291,-39.411 ; v1@152.334,-39.741 ccw(c151.868,-40.207) 151.868,-39.548 ccw(c151.868,-38.889) v1@152.334,-39.355 ; v1@165.937,-36.404 ccw(c165.937,-35.739) 166.407,-36.209 ; v1(165.937,-36.677) 167.005,-35.611 167.005,6.898 171.461,11.354 181.026,11.354 184.498,14.826 184.498,22.232 P36.20@183.337,23.393 ; v1@166.21,-36.677 cw(c166.864,-36.677) 166.402,-36.214 ; P36.20@183.337,22.77 cw(c183.337,21.266) 184.401,22.33 cw(c185.464,23.393) P36.20@183.96,23.393 ; P36.20@183.337,23.024 cw(c183.337,22.134) 183.967,22.763 cw(c184.597,23.393) P36.20@183.706,23.393
  Bottom Layer w0.254: v1(152.527,-39.548) 156.794,-39.548 159.665,-36.677 v1(165.937,-36.677) ; v1@152.72,-39.741 cw(c153.186,-40.207) 153.186,-39.548 cw(c153.186,-38.889) v1@152.72,-39.355 ; v1@165.744,-36.87 ccw(c165.278,-37.336) 165.278,-36.677 ccw(c165.278,-36.017) v1@165.744,-36.484
DJ4_KC11: P54.3 R91.1 U37.6 | length 22.4
  Top Layer w0.254: R91.1@140.2,-47.409 cw(c140.2,-48.068) 140.666,-47.602 cw(c141.132,-47.136) R91.1@140.473,-47.136 ; v1(140.2,-47.136) 143.076,-50.012 ; R91.1@140.278,-46.914 cw(c140.1,-47.423) R91.1@140.621,-47.283 ; R91.1@140.327,-47.644 cw(c140.327,-48.563) 140.978,-47.913 ; R91.1@140.581,-47.136 ccw(c141.501,-47.136) 140.851,-47.786 ; R91.1@140.835,-47.136 ccw(c142.368,-47.136) 141.284,-48.22 ; U37.6@143.465,-50.19 ccw(c143.076,-50.525) 143.076,-50.012 ; U37.6@143.465,-49.833 cw(c143.076,-49.498) 143.076,-50.012 ; U37.6@144.272,-50.012 143.076,-50.012
  Bottom Layer w0.254: P54.3@134.87,-47.136 v1(140.2,-47.136) ; P54.3@135.286,-47.595 cw(c136.396,-48.704) 136.396,-47.136 ; P54.3@135.286,-46.72 ccw(c136.29,-45.716) 136.29,-47.136 ; P54.3@135.466,-47.775 cw(c137.009,-49.318) 137.009,-47.136 ; P54.3@135.466,-46.54 ccw(c136.904,-45.102) 136.904,-47.136 ; v1@140.007,-47.329 ccw(c139.541,-47.795) 139.541,-47.136 ccw(c139.541,-46.477) v1@140.007,-46.943
DJ4_KC22: P54.2 R93.1 U38.6 | length 22.4
  Top Layer w0.254: R93.1@140.2,-43.929 cw(c140.2,-44.588) 140.666,-44.122 cw(c141.132,-43.656) R93.1@140.473,-43.656 ; v1(140.2,-43.656) 142.598,-46.054 U38.6@144.272,-46.054 ; R93.1@140.278,-43.434 cw(c140.1,-43.943) R93.1@140.621,-43.804 ; R93.1@140.327,-44.164 cw(c140.327,-45.084) 140.978,-44.433 ; R93.1@140.581,-43.656 ccw(c141.501,-43.656) 140.851,-44.306 ; R93.1@140.835,-43.656 ccw(c142.368,-43.656) 141.284,-44.74 ; U38.6@143.479,-46.247 ccw(c143.013,-46.713) 143.013,-46.054 ccw(c143.013,-45.395) U38.6@143.479,-45.861
  Bottom Layer w0.254: P54.2@134.85,-43.656 v1(140.2,-43.656) ; P54.2@135.286,-44.095 cw(c136.347,-45.156) 136.347,-43.656 ; P54.2@135.286,-43.22 ccw(c136.339,-42.167) 136.339,-43.656 ; P54.2@135.466,-44.275 cw(c136.96,-45.769) 136.96,-43.656 ; P54.2@135.466,-43.04 ccw(c136.952,-41.554) 136.952,-43.656 ; v1@140.007,-43.849 ccw(c139.541,-44.315) 139.541,-43.656 ccw(c139.541,-42.997) v1@140.007,-43.463
DJ4_KC33: P54.1 R95.1 U39.6 | length 22.4
  Top Layer w0.254: R95.1@140.2,-40.176 v1(140.232,-40.208) 142.111,-42.087 U39.6@144.272,-42.087 ; R95.1@140.232,-40.481 cw(c140.232,-41.14) 140.698,-40.674 cw(c141.164,-40.208) R95.1@140.505,-40.208 ; R95.1@140.327,-40.684 cw(c140.327,-41.604) 140.978,-40.953 ; R95.1@140.581,-40.176 ccw(c141.501,-40.176) 140.851,-40.826 ; R95.1@140.835,-40.176 ccw(c142.368,-40.176) 141.284,-41.26 ; U39.6@143.479,-42.28 ccw(c143.013,-42.746) 143.013,-42.087 ccw(c143.013,-41.428) U39.6@143.479,-41.894
  Bottom Layer w0.254: P54.1@134.899,-40.208 v1(140.232,-40.208) ; P54.1@135.107,-39.899 ccw(c135.852,-39.154) 135.852,-40.208 ; P54.1@135.286,-40.595 cw(c136.22,-41.529) 136.22,-40.208 ; P54.1@135.286,-39.72 ccw(c136.466,-38.54) 136.466,-40.208 ; P54.1@135.466,-40.775 cw(c136.834,-42.142) 136.834,-40.208 ; P54.1@135.466,-39.54 ccw(c137.079,-37.927) 137.079,-40.208 ; v1@140.039,-40.401 ccw(c139.573,-40.867) 139.573,-40.208 ccw(c139.573,-39.549) v1@140.039,-40.015
DWQ1: P36.9 P44.2 | length 35.2
  Top Layer w0.254: P36.9@170.637,20.853 171.907,22.123 171.907,24.232 172.847,25.171 189.057,25.171 P44.2@192.131,28.245 ; P36.9@170.637,21.222 ccw(c170.637,22.113) 171.267,21.483 ccw(c171.897,20.853) P36.9@171.006,20.853 ; P36.9@170.637,21.476 ccw(c170.637,22.98) 171.701,21.917 ccw(c172.764,20.853) P36.9@171.26,20.853 ; P44.2@191.258,28.245 cw(c189.15,28.245) 190.64,26.754 cw(c192.131,25.264) P44.2@192.131,27.372 ; P44.2@191.512,28.245 cw(c190.017,28.245) 191.074,27.188 cw(c192.131,26.131) P44.2@192.131,27.626
DWQ2: P36.10 P46.2 | length 21.7
  Top Layer w0.254: P36.10@170.215,23.851 ccw(c169.325,24.816) 170.637,24.816 ; P36.10@170.387,23.665 ccw(c169.86,24.236) 170.637,24.236 ccw(c171.414,24.236) P36.10@170.887,23.665 ; P36.10@170.637,23.393 170.637,24.816 ; P36.10@171.06,23.851 cw(c171.949,24.816) 170.637,24.816 ; P46.2@179.498,28.245 cw(c177.39,28.245) 178.88,26.754 cw(c180.371,25.264) P46.2@180.371,27.372 ; P46.2@179.752,28.245 cw(c178.257,28.245) 179.314,27.188 cw(c180.371,26.131) P46.2@180.371,27.626 ; P46.2@180.371,28.245 177.881,25.756 171.577,25.756 170.637,24.816
GND24_B: C1.1 D41.2 P35.40 P36.2 P38.2 P39.5 P40.2 P41.2 P43.2 P44.1 P45.2 P46.1 P47.2 P49.5 P50.7 P51.5 P52.5 P53.2 P54.5 P56.9 P57.9 P58.9 P59.9 P60.2 P62.2 Q1.3 R1.2 R99.1 R103.1 R108.1 R112.1 R118.1 R124.1 R128.1 R135.1 R140.1 R144.1 U13.4 U14.4 U15.4 U16.4 U17.4 U18.4 U19.4 U20.4 U21.4 U22.4 U23.4 U24.4 U25.4 U26.4 U27.4 U28.4 U29.4 U30.4 U31.4 U32.4 U33.4 U34.4 U35.4 U36.4 U37.4 U38.4 U39.4 U41.1 U41.3 U44.1 U44.3 U47.1 U47.3 U48.5 U51.1 U51.3 U52.5 U55.1 U55.3 | length 989.7
  Top Layer w0.762: 129.265,-35.378 P51.5@134.849,-35.378 ; 129.307,-54.157 P54.5@134.849,-54.157 ; 129.333,2.181 P52.5@134.849,2.181 ; 129.375,-16.599 P49.5@134.849,-16.599 ; P54.5@134.411,-54.595 ccw(c133.354,-55.652) 133.354,-54.157 ccw(c133.354,-52.663) P54.5@134.411,-53.72 ; P51.5@134.411,-35.816 ccw(c133.354,-36.872) 133.354,-35.378 ccw(c133.354,-33.884) P51.5@134.411,-34.94 ; P49.5@134.411,-17.036 ccw(c133.354,-18.093) 133.354,-16.599 ccw(c133.354,-15.104) P49.5@134.411,-16.161 ; P52.5@134.411,1.743 ccw(c133.354,0.686) 133.354,2.181 ccw(c133.354,3.675) P52.5@134.411,2.618 ; 137.254,26.094 cw(c136.604,25.444) D41.2@137.523,25.444 ; C1.1@137.695,19.341 ccw(c137.351,18.224) 136.525,19.05 ; C1.1@137.897,19.583 137.058,19.583 136.525,19.05 ; D41.2@137.904,25.444 136.551,26.797 v1(132.385,26.797) 130.429,26.797 ; P56.9@141.954,-63.167 cw(c141.324,-63.797) 142.215,-63.797 cw(c143.105,-63.797) P56.9@142.476,-63.167 ; 142.215,-64.973 P56.9@142.215,-62.906 ; 143.236,31.287 cw(c140.194,28.245) P62.2@144.496,28.245 ; U37.4@144.272,-47.472 145.492,-47.472 146.075,-46.888 146.075,16.307 ; U38.4@144.272,-43.514 146.072,-43.514 ; U39.4@144.272,-39.547 146.074,-39.547 ; U22.4@144.272,-28.879 146.051,-28.879 ; U26.4@144.272,-24.986 146.007,-24.986 ; U30.4@144.272,-20.866 146.012,-20.866 ; U13.4@144.272,-10.032 146.026,-10.032 ; U14.4@144.272,-5.968 146.026,-5.968 ; U19.4@144.272,-1.955 146.024,-1.955 ; U34.4@144.272,8.612 146.026,8.612 ; U35.4@144.272,12.65 146.074,12.65 ; U36.4@144.272,16.74 145.643,16.74 146.075,16.307 ; 144.537,29.986 cw(c142.795,28.245) P62.2@145.258,28.245 ; P62.2@144.77,28.758 ccw(c144.332,29.408) 145.115,29.408 ; U37.4@144.872,-47.453 ccw(c144.872,-45.909) 145.963,-47.001 ; U36.4@144.874,16.721 cw(c145.05,15.282) 146.075,16.307 ; P62.2@145.115,28.245 145.115,29.408 ; P62.2@145.461,28.758 cw(c145.899,29.408) 145.115,29.408 ; Q1.3@154.432,24.153 159.717,24.153 ; 157.752,24.153 cw(c157.752,20.668) P36.2@160.216,23.132 ; 159.591,24.153 cw(c159.591,22.507) P36.2@160.755,23.671 ; P36.2@160.477,23.393 159.717,24.153 ; P57.9@162.655,-63.167 cw(c162.025,-63.797) 162.916,-63.797 cw(c163.806,-63.797) P57.9@163.177,-63.167 ; 162.916,-64.795 P57.9@162.916,-62.906 ; P60.2@168.173,28.682 ccw(c167.116,29.739) 168.61,29.739 ccw(c170.105,29.739) P60.2@169.048,28.682 ; P60.2@168.61,28.245 168.61,33.305 ; U17.4@179.426,-34.594 181.103,-34.594 181.864,-33.833 v1(181.864,-27.407) 181.864,-8.484 181.381,-8.001 U48.5@179.908,-8.001 ; U21.4@179.426,-30.53 181.838,-30.53 ; U27.4@179.426,-26.339 181.787,-26.339 ; U31.4@179.426,-22.148 181.838,-22.148 ; U52.5@179.908,-15.215 181.813,-15.215 ; U48.5@179.926,-8.019 ccw(c179.234,-7.326) 180.213,-7.326 ; U48.5@180.213,-7.696 v1(180.213,-5.461) ; P46.1@183.433,28.682 ccw(c182.376,29.739) 183.871,29.739 ccw(c185.365,29.739) P46.1@184.308,28.682 ; P58.9@183.483,-63.167 cw(c182.853,-63.797) 183.744,-63.797 cw(c184.634,-63.797) P58.9@184.005,-63.167 ; 183.744,-64.948 P58.9@183.744,-62.906 ; P46.1@183.871,28.245 183.871,33.325 ; R144.1@190.983,2.261 192.811,2.261 ; v1(191.008,-5.461) R140.1@191.008,-3.226 192.049,-3.226 192.811,-2.464 ; R140.1@191.18,-2.976 ccw(c191.506,-1.158) 192.811,-2.464 ; v1(193.523,6.35) 193.523,2.972 192.811,2.261 ; P44.1@195.193,28.682 ccw(c194.136,29.739) 195.631,29.739 ccw(c197.125,29.739) P44.1@196.068,28.682 ; P44.1@195.631,28.245 195.631,33.198 ; v1(198.247,6.096) U55.1@199.873,6.096 201.016,6.096 201.727,5.385 201.727,4.013 ; U55.3@199.873,3.556 201.27,3.556 ; U55.3@200.516,3.537 ccw(c200.883,3.943) 201.27,3.556 ; U55.3@200.533,3.531 ccw(c200.561,5.179) 201.727,4.013 ; U55.1@200.533,6.121 cw(c200.533,5.018) 201.313,5.798 ; 203.041,-28.499 U44.1@204.953,-28.499 ; 203.067,-32.563 U41.3@204.953,-32.563 ; 203.121,-34.643 ccw(c204.292,-33.473) U41.1@204.292,-35.128 ; 203.124,-14.224 U47.3@204.902,-14.224 ; 203.149,-10.795 U51.1@204.902,-10.795 ; 203.302,-16.764 U47.1@204.902,-16.764 ; P59.9@204.184,-63.167 cw(c203.554,-63.797) 204.445,-63.797 cw(c205.335,-63.797) P59.9@204.706,-63.167 ; U51.3@204.241,-8.23 ccw(c204.238,-9.877) 203.073,-8.712 ; U51.3@204.258,-8.236 ccw(c203.904,-8.629) 203.53,-8.255 ; U41.1@204.309,-35.122 cw(c203.955,-34.729) 203.581,-35.103 ; P59.9@204.445,-62.906 204.445,-64.999 ; U51.3@204.902,-8.255 203.53,-8.255 ; U41.1@204.953,-35.103 203.581,-35.103 ; U44.3@204.953,-25.959 203.016,-25.959 ; P38.2@210.464,28.682 ccw(c209.407,29.739) 210.901,29.739 ccw(c212.396,29.739) P38.2@211.339,28.682 ; P38.2@210.901,28.245 210.901,33.305 ; P40.2@215.127,-58.273 cw(c214.07,-59.33) 215.565,-59.33 cw(c217.059,-59.33) P40.2@216.002,-58.273 ; 215.565,-64.851 P40.2@215.565,-57.836 ; R103.1@217.146,-23.379 ccw(c218.098,-23.454) 217.423,-24.129 ; R112.1@217.226,-16.709 cw(c217.953,-16.24) 217.341,-15.628 ; R99.1@217.27,-30.685 cw(c216.775,-31.18) v1@217.475,-31.18 ; v1@217.461,-31.28 ccw(c217.056,-30.899) R99.1@217.449,-30.505 ; v1(217.475,-31.293) 217.475,-30.531 R99.1@217.449,-30.505 ; R112.1@217.866,-16.296 cw(c218.764,-15.716) 218.008,-14.961 ; R103.1@217.906,-23.439 ccw(c220.267,-23.624) 218.592,-25.298 ; 222.556,0.204 U25.4@225.074,0.204 ; 222.579,4.141 U29.4@225.074,4.141 ; 222.581,-3.733 U23.4@225.074,-3.733 ; 222.63,-7.67 U18.4@225.074,-7.67 ; 223.011,-39.293 U20.4@225.074,-39.293 ; 223.011,-35.229 U24.4@225.074,-35.229 ; v1@223.036,-31.292 U28.4@225.074,-31.292 ; 223.115,-42.775 ccw(c224.474,-41.415) U16.4@224.474,-43.338 ; U16.4@225.074,-43.357 223.697,-43.357 222.987,-42.647 222.987,-29.261 223.749,-28.499 224.765,-28.499 225.074,-28.189 U32.4@225.074,-27.355 ; U15.4@225.074,-11.607 223.392,-11.607 222.555,-10.77 ; v1(227.33,17.247) v1(227.33,13.373) v1(227.33,9.5) 227.33,8.56 226.848,8.078 U33.4@225.074,8.078 223.394,8.078 222.555,7.239 222.555,-10.77 ; P41.2@230.367,-58.273 cw(c229.31,-59.33) 230.805,-59.33 cw(c232.299,-59.33) P41.2@231.242,-58.273 ; 230.805,-64.928 P41.2@230.805,-57.836 ; P39.5@241.859,26.141 245.69,26.141 ; P53.2@241.96,-53.726 245.649,-53.726 ; P50.7@241.96,-17.329 245.675,-17.329 ; P47.2@241.96,-9.098 245.649,-9.098 ; P45.2@241.96,-0.843 245.638,-0.843 ; P43.2@241.96,7.412 245.623,7.412 ; P39.5@242.296,25.704 cw(c243.353,24.647) 243.353,26.141 cw(c243.353,27.636) P39.5@242.296,26.579 ; P53.2@242.398,-53.06 ccw(c244.007,-51.451) 244.007,-53.726 ; P50.7@242.398,-17.766 cw(c243.455,-18.823) 243.455,-17.329 cw(c243.455,-15.834) P50.7@242.398,-16.891 ; P47.2@242.398,-9.536 cw(c243.455,-10.593) 243.455,-9.098 cw(c243.455,-7.604) P47.2@242.398,-8.661 ; P45.2@242.398,-1.281 cw(c243.455,-2.338) 243.455,-0.843 cw(c243.455,0.651) P45.2@242.398,-0.406 ; P43.2@242.398,6.974 cw(c243.455,5.917) 243.455,7.412 cw(c243.455,8.906) P43.2@242.398,7.849 ; 129.261,20.676 129.261,25.629 130.429,26.797 ; 129.261,20.676 129.261,-63.678 130.581,-64.999 204.445,-64.999 ; 129.261,20.676 131.293,20.676 132.918,19.05 136.525,19.05 ; 130.429,26.797 135.153,31.521 143.002,31.521 145.115,29.408 ; 159.717,24.153 159.614,24.257 159.614,31.775 161.214,33.376 239.09,33.376 245.694,26.772 v1(245.694,20.828) 245.694,-58.826 239.522,-64.999 204.445,-64.999 ; 159.847,24.023 ccw(c160.477,24.653) P36.2@160.477,23.762 ; 159.847,24.023 cw(c159.217,23.393) P36.2@160.108,23.393 ; 159.847,24.023 ccw(c160.477,24.653) P36.2@160.477,23.762 ; 159.847,24.023 cw(c159.217,23.393) P36.2@160.108,23.393 ; 159.847,24.023 ccw(c160.477,24.653) P36.2@160.477,23.762 ; 159.847,24.023 cw(c159.217,23.393) P36.2@160.108,23.393 ; 192.811,-2.464 192.811,2.261 ; 201.27,3.556 201.727,4.013 ; 203.016,-25.959 203.016,-34.538 203.581,-35.103 ; 203.016,-25.959 203.016,-23.527 203.987,-22.555 203.987,-19.583 203.073,-18.669 203.073,-8.712 ; 203.073,-8.712 203.53,-8.255 ; R99.1@217.449,-30.505 217.449,-28.372 218.592,-27.229 218.592,-25.298 ; 218.008,-14.961 221.894,-14.961 222.555,-14.3 222.555,-10.77 ; 218.008,-14.961 217.526,-15.443 R112.1@217.526,-16.434 v1(217.526,-17.653) R108.1@217.526,-19.482 R103.1@217.526,-23.419 217.526,-24.232 218.592,-25.298
  Bottom Layer w0.762: R1.2@131.877,24.486 131.877,26.289 v1(132.385,26.797) ; 131.877,25.525 cw(c133.657,25.525) v1@132.398,26.784 ; 131.877,26.079 cw(c132.611,26.079) v1@132.391,26.779 ; P51.5@134.849,-35.378 v1(146.071,-35.378) ; P51.5@135.286,-35.816 cw(c136.343,-36.872) 136.343,-35.378 cw(c136.343,-33.884) P51.5@135.286,-34.94 ; v1(180.213,-5.461) v1(191.008,-5.461) ; v1(181.864,-27.407) v1(203.022,-27.407) ; R135.1@190.965,7.798 190.957,7.79 190.957,6.731 191.338,6.35 197.993,6.35 v1(198.247,6.096) ; 197.588,6.35 cw(c197.588,5.437) v1@198.234,6.083 ; v1(203.073,-17.653) v1(217.526,-17.653) ; v1(217.475,-31.293) v1(223.012,-31.293) ; v1(227.33,17.247) 227.33,18.339 228.346,19.355 238.582,19.355 240.055,20.828 v1(245.694,20.828)
INPUT_25_B: P35.33 R73.1 U27.6 | length 79.5
  Top Layer w0.254: v1@170.216,-42.149 ccw(c169.75,-41.683) 170.409,-41.683 ccw(c171.068,-41.683) v1@170.602,-42.149 ; v1(170.409,-42.342) 170.409,-31.547 v1(171.044,-30.912) ; v1@170.771,-30.912 cw(c170.112,-30.912) 170.578,-31.378 cw(c171.044,-31.844) v1@171.044,-31.185 ; R73.1@176.018,-29.239 cw(c175.151,-30.106) 176.378,-30.106 cw(c177.604,-30.106) R73.1@176.737,-29.239 ; v1@176.185,-30.719 ccw(c175.719,-30.253) 176.378,-30.253 ccw(c177.037,-30.253) v1@176.571,-30.719 ; v1(176.378,-30.912) R73.1@176.378,-28.88 U27.6@179.426,-28.879 U27.6@179.426,-28.879 ; R73.1@176.864,-29.239 cw(c177.731,-30.106) 177.731,-28.88 cw(c177.731,-27.653) R73.1@176.864,-28.521 ; 178.164,-28.88 ccw(c178.164,-28.217) U27.6@178.633,-28.686 ; 178.169,-28.88 cw(c178.169,-29.535) U27.6@178.633,-29.072 ; P35.33@202.754,-52.639 ccw(c202.598,-52.273) 202.997,-52.273 ; P35.33@202.997,-53.213 202.997,-52.272 ; P35.33@203.24,-52.639 cw(c203.395,-52.273) 202.997,-52.273 ; v1@203.302,-44.52 cw(c203.302,-45.179) 203.768,-44.713 cw(c204.234,-44.247) v1@203.575,-44.247 ; v1(203.302,-44.247) 204.128,-45.073 204.128,-51.141 202.997,-52.272
  Bottom Layer w0.254: v1@170.409,-42.615 cw(c170.409,-43.274) 170.875,-42.808 cw(c171.341,-42.342) v1@170.682,-42.342 ; v1(170.409,-42.342) 171.533,-43.466 202.355,-43.466 203.136,-44.247 v1(203.302,-44.247) ; v1(171.044,-30.912) v1(176.378,-30.912) ; v1@171.237,-31.105 cw(c171.703,-31.571) 171.703,-30.912 cw(c171.703,-30.253) v1@171.237,-30.719 ; v1@176.185,-31.105 ccw(c175.719,-31.571) 175.719,-30.912 ccw(c175.719,-30.253) v1@176.185,-30.719 ; 202.553,-43.664 ccw(c203.302,-42.915) v1@203.302,-43.974
INPUT_26_B: P35.34 R81.1 U31.6 | length 84.6
  Top Layer w0.254: v1@168.946,-42.149 ccw(c168.48,-41.683) 169.139,-41.683 ccw(c169.798,-41.683) v1@169.332,-42.149 ; v1(169.139,-42.342) 169.139,-27.737 v1(170.409,-26.467) ; v1@170.136,-26.467 cw(c169.477,-26.467) 169.943,-26.933 cw(c170.409,-27.399) v1@170.409,-26.74 ; R81.1@176.018,-25.048 cw(c175.151,-25.915) 176.378,-25.915 cw(c177.604,-25.915) R81.1@176.737,-25.048 ; v1@176.185,-26.274 ccw(c175.719,-25.808) 176.378,-25.808 ccw(c177.037,-25.808) v1@176.571,-26.274 ; v1(176.378,-26.467) R81.1@176.378,-24.689 U31.6@179.426,-24.688 U31.6@179.426,-24.688 ; R81.1@176.864,-25.048 cw(c177.731,-25.915) 177.731,-24.689 cw(c177.731,-23.462) R81.1@176.864,-24.33 ; 178.164,-24.689 ccw(c178.164,-24.026) U31.6@178.633,-24.495 ; 178.169,-24.689 cw(c178.169,-25.344) U31.6@178.633,-24.881 ; v1@202.032,-44.52 cw(c202.032,-45.179) 202.498,-44.713 cw(c202.964,-44.247) v1@202.305,-44.247 ; v1(202.032,-44.247) 202.997,-45.212 P35.34@202.997,-50.673 ; P35.34@202.556,-50.232 ccw(c201.493,-49.169) 202.997,-49.169 ccw(c204.501,-49.169) P35.34@203.437,-50.232 ; P35.34@202.736,-50.412 ccw(c202.106,-49.782) 202.997,-49.782 ccw(c203.888,-49.782) P35.34@203.258,-50.412
  Bottom Layer w0.254: v1@169.139,-42.615 cw(c169.139,-43.274) 169.605,-42.808 cw(c170.071,-42.342) v1@169.412,-42.342 ; v1(169.139,-42.342) 171.044,-44.247 v1(202.032,-44.247) ; v1(170.409,-26.467) v1(176.378,-26.467) ; v1@170.602,-26.66 cw(c171.068,-27.126) 171.068,-26.467 cw(c171.068,-25.808) v1@170.602,-26.274 ; v1@176.185,-26.66 ccw(c175.719,-27.126) 175.719,-26.467 ccw(c175.719,-25.808) v1@176.185,-26.274 ; v1@201.839,-44.44 ccw(c201.373,-44.906) 201.373,-44.247 ccw(c201.373,-43.588) v1@201.839,-44.054